# Altium PCB Flexy.PcbDoc
Units mm, origin at the board's own origin, x right, y up, seen from the top; angles counter-clockwise.
Board outline 89.43 x 64.03 mm, 2 copper layers (Top Layer, Bottom Layer); 87 components, 26 nets, 87 pads, 94 vias.
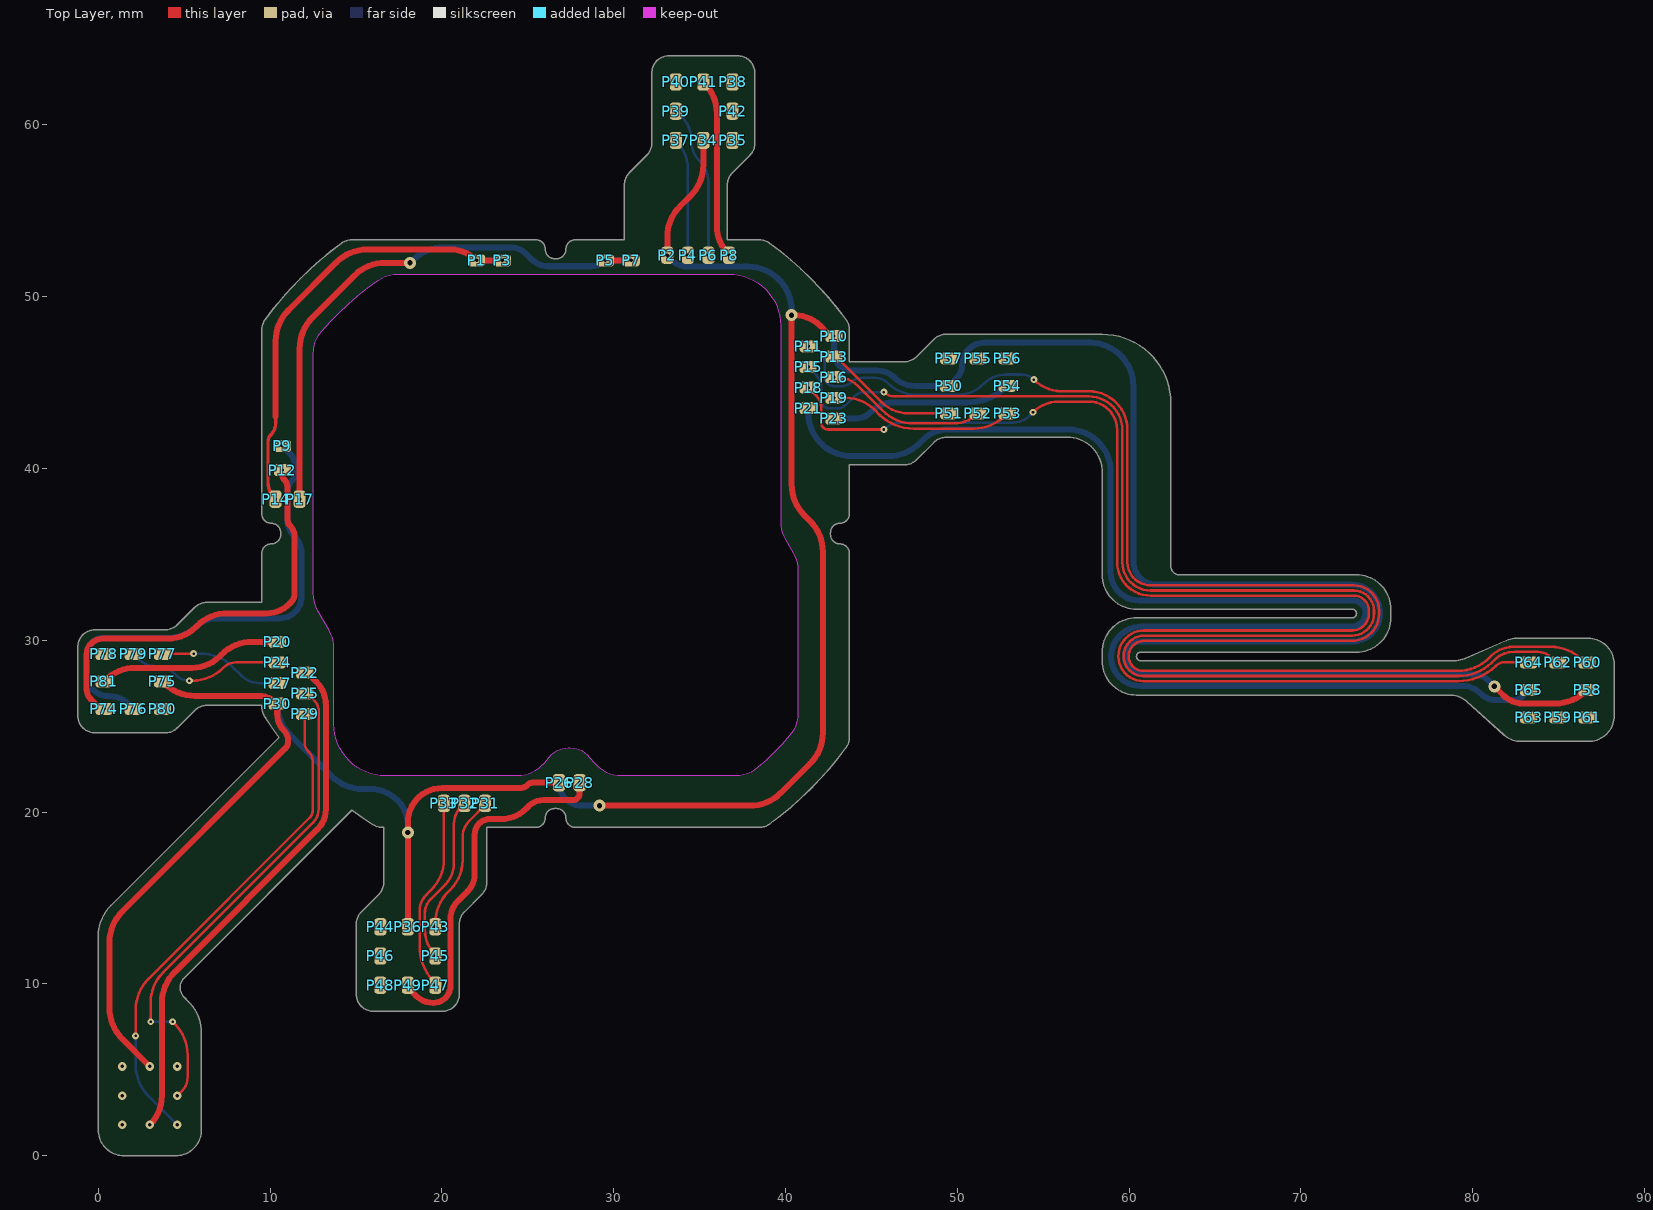
[diagram p0: Top Layer view]
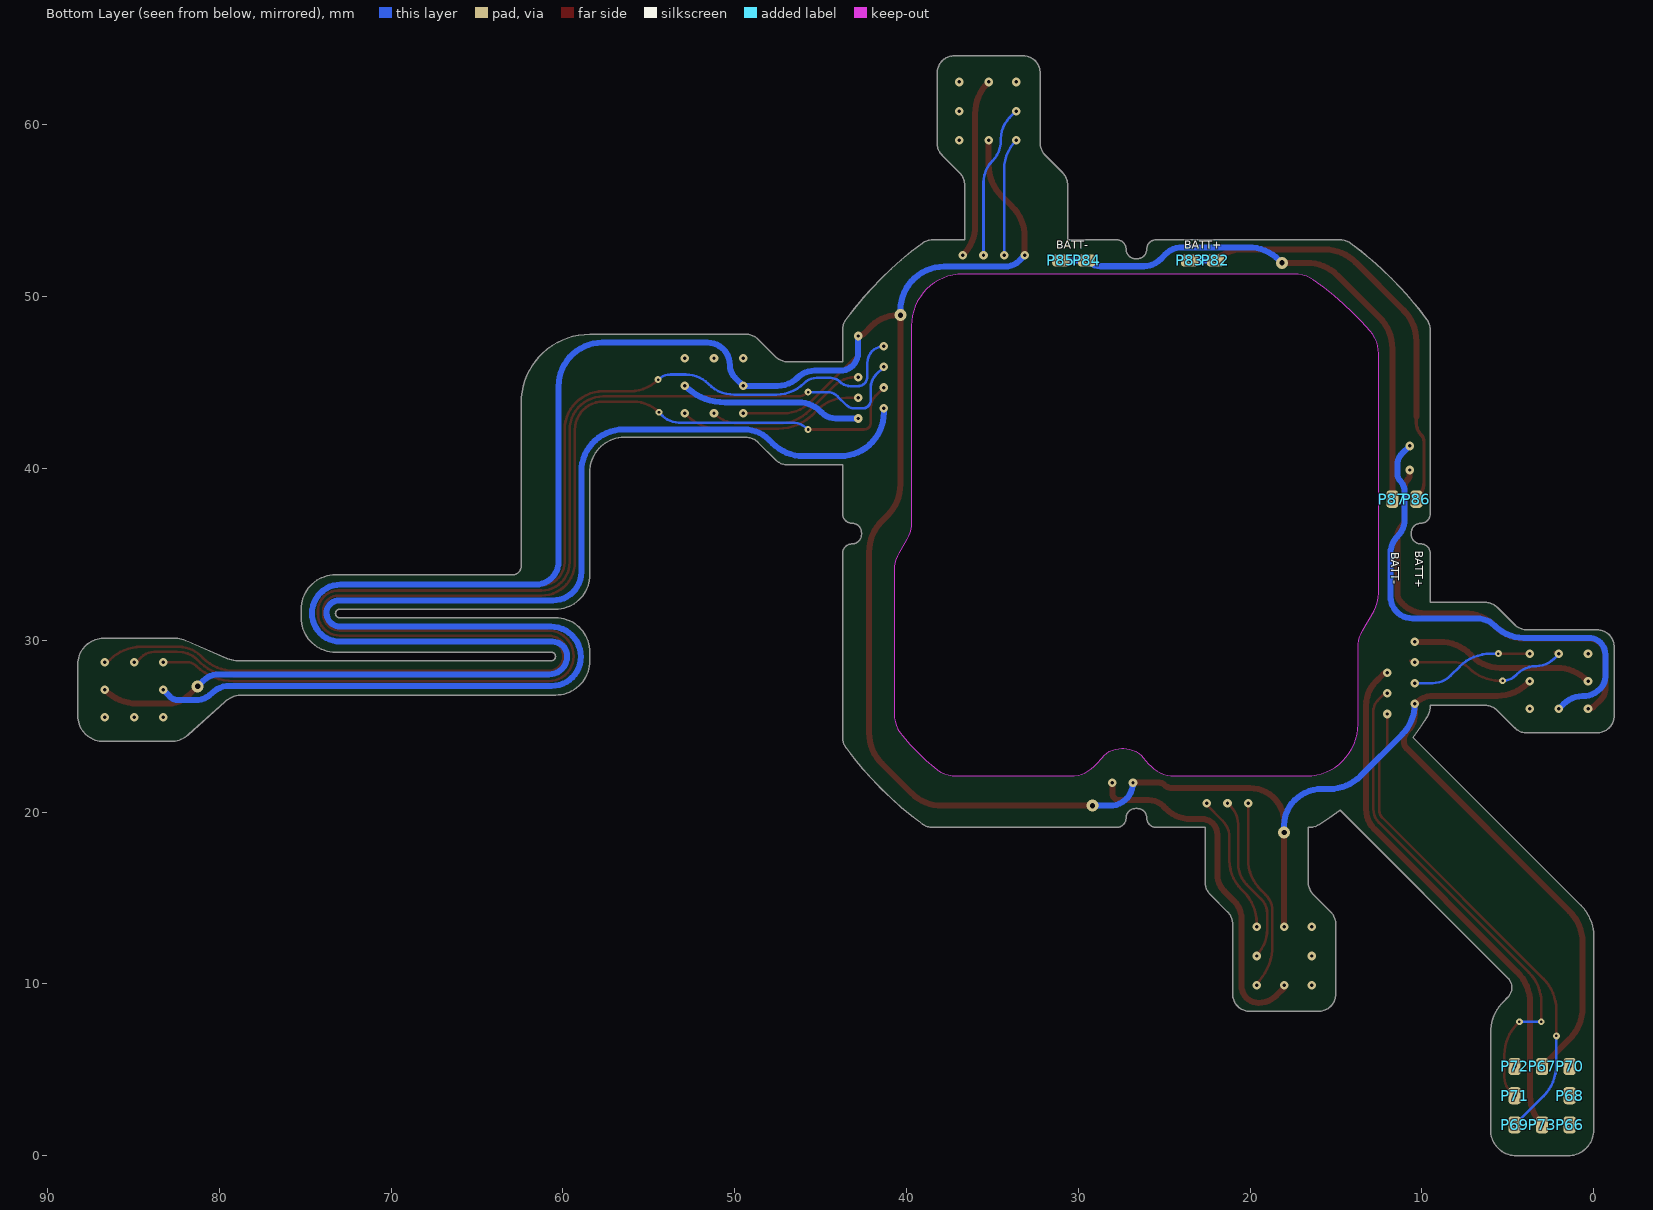
[diagram p1: Bottom Layer view, seen from below]

## Layer stack, top to bottom
Top Coverlay 1: solder mask 0.012, FC-001, Dk 4
Top Layer: signal copper 0.0356
Dielectric 1: dielectric 0.32, FR-4, Dk 4.8
Bottom Layer: signal copper 0.0356
Bottom Coverlay 1: solder mask 0.012, FC-001, Dk 4

## Board outline
0,1.5 ccw(c1.5,1.5) 1.5,0 4.5,0 ccw(c4.5,1.5) 6,1.5 6,7.184 ccw(c3.5,7.184) 5.268,8.952 4.997,9.223 cw(c5.563,9.788) 4.997,10.354 14.754,20.111 ccw(c26.615,36.215) 15.995,19.268 ccw(c16.526,20.115) 16.526,19.115 16.615,19.115 16.615,15.919 cw(c15.615,15.919) 16.322,15.212 15.308,14.198 ccw(c16.015,13.491) 15.015,13.491 15.015,9.405 ccw(c16.015,9.405) 16.015,8.405 20.015,8.405 ccw(c20.015,9.405) 21.015,9.405 21.015,13.491 cw(c22.015,13.491) 21.308,14.198 22.322,15.212 ccw(c21.615,15.919) 22.615,15.919 22.615,19.115 25.465,19.115 ccw(c25.465,19.665) 26.015,19.665 cw(c26.565,19.665) 26.565,20.215 26.665,20.215 cw(c26.665,19.665) 27.215,19.665 ccw(c27.765,19.665) 27.765,19.115 38.481,19.115 ccw(c38.481,20.115) 39.074,19.31 ccw(c26.615,36.215) 43.52,23.756 ccw(c42.715,24.349) 43.715,24.349 43.715,35.065 ccw(c43.165,35.065) 43.165,35.615 cw(c43.165,36.165) 42.615,36.165 42.615,36.265 cw(c43.165,36.265) 43.165,36.815 ccw(c43.165,37.365) 43.715,37.365 43.715,40.215 46.911,40.215 ccw(c46.911,41.215) 47.618,40.508 48.632,41.522 cw(c49.339,40.815) 49.339,41.815 56.425,41.815 cw(c56.425,39.815) 58.425,39.815 58.425,33.815 ccw(c60.425,33.815) 60.425,31.815 72.981,31.815 cw(c72.981,31.565) 72.981,31.315 60.425,31.315 ccw(c60.425,29.315) 58.425,29.315 58.425,28.815 ccw(c60.425,28.815) 60.425,26.815 78.656,26.815 cw(c78.656,25.315) 79.659,26.43 81.804,24.5 ccw(c82.807,25.615) 82.807,24.115 86.731,24.115 ccw(c86.731,25.615) 88.231,25.615 88.231,28.615 ccw(c86.731,28.615) 86.731,30.115 82.542,30.115 ccw(c82.542,28.615) 81.946,29.991 79.517,28.939 cw(c78.92,30.315) 78.92,28.815 60.675,28.815 cw(c60.675,29.065) 60.675,29.315 73.231,29.315 ccw(c73.231,31.315) 75.231,31.315 75.231,31.815 ccw(c73.231,31.815) 73.231,33.815 62.925,33.815 cw(c62.925,34.315) 62.425,34.315 62.425,43.815 ccw(c58.425,43.815) 58.425,47.815 49.339,47.815 ccw(c49.339,46.815) 48.632,47.522 47.618,46.508 cw(c46.911,47.215) 46.911,46.215 43.715,46.215 43.715,48.08 ccw(c42.715,48.08) 43.52,48.674 ccw(c26.615,36.215) 39.074,53.12 ccw(c38.481,52.315) 38.481,53.315 36.615,53.315 36.615,56.511 cw(c37.615,56.511) 36.908,57.218 37.922,58.232 ccw(c37.215,58.939) 38.215,58.939 38.215,63.025 ccw(c37.215,63.025) 37.215,64.025 33.215,64.025 ccw(c33.215,63.025) 32.215,63.025 32.215,58.939 cw(c31.215,58.939) 31.922,58.232 30.908,57.218 ccw(c31.615,56.511) 30.615,56.511 30.615,53.315 27.765,53.315 ccw(c27.765,52.765) 27.215,52.765 cw(c26.665,52.765) 26.665,52.215 26.565,52.215 cw(c26.565,52.765) 26.015,52.765 ccw(c25.465,52.765) 25.465,53.315 14.75,53.315 ccw(c14.75,52.315) 14.156,53.12 ccw(c26.615,36.215) 9.71,48.674 ccw(c10.515,48.08) 9.515,48.08 9.515,37.365 ccw(c10.065,37.365) 10.065,36.815 cw(c10.065,36.265) 10.615,36.265 10.615,36.165 cw(c10.065,36.165) 10.065,35.615 ccw(c10.065,35.065) 9.515,35.065 9.515,32.215 6.319,32.215 ccw(c6.319,31.215) 5.612,31.922 4.598,30.908 cw(c3.891,31.615) 3.891,30.615 -0.195,30.615 ccw(c-0.195,29.615) -1.195,29.615 -1.195,25.615 ccw(c-0.195,25.615) -0.195,24.615 3.891,24.615 ccw(c3.891,25.615) 4.598,24.908 5.612,25.922 cw(c6.319,25.215) 6.319,26.215 9.515,26.215 9.515,26.126 ccw(c10.515,26.126) 9.668,25.595 ccw(c26.615,36.215) 10.512,24.354 0.732,14.575 ccw(c2.5,12.807) 0,12.807
cut-out: 16.715,22.115 cw(c16.715,25.115) 13.715,25.115 13.715,29.579 ccw(c11.715,29.579) 13.447,30.579 12.783,31.729 cw(c14.515,32.729) 12.515,32.729 12.515,46.683 cw(c14.515,46.683) 13.003,47.992 cw(c26.615,36.215) 16.28,50.952 cw(c17.429,49.315) 17.429,51.315 36.715,51.315 cw(c36.715,48.315) 39.715,48.315 39.715,36.883 ccw(c41.715,36.883) 39.983,35.883 40.447,35.079 cw(c38.715,34.079) 40.715,34.079 40.715,25.746 cw(c38.715,25.746) 40.228,24.438 cw(c26.615,36.215) 38.392,22.602 cw(c37.084,24.115) 37.084,22.115 30.444,22.115 cw(c30.444,24.115) 28.916,22.825 28.614,23.182 ccw(c27.468,22.215) 27.468,23.715 27.362,23.715 ccw(c27.362,22.215) 26.216,23.182 25.914,22.825 cw(c24.386,24.115) 24.386,22.115

## Design rules (kind name [scope] priority, off if disabled: settings)
BoardOutlineClearance [All] p1: gap=0.25 ignorepadtopadclearanceinfootprint=FALSE
Clearance [All] p1: gap=0.15 ignorepadtopadclearanceinfootprint=FALSE
ComponentClearance [All] p1: gap=0.1 collisioncheckmode=3 verticalgap=0.1 showdistances=FALSE
DiffPairsRouting [All] p1: maxlimit=0.5 minlimit=0.15 mostfreqgap=0.2 toplayer_minwidth=0.15 toplayer_maxwidth=1 toplayer_prefwidth=0.2 bottomlayer_minwidth=0.15 bottomlayer_maxwidth=1 bottomlayer_prefwidth=0.2 maxuncoupledlength=12.7
HoleSize [All] p1: absolutevalues=TRUE maxlimit=6 minlimit=0.025 maxpercent=80.000 minpercent=20.000
MinimumSolderMaskSliver [All] p1: minsoldermaskwidth=0
PlaneClearance [All] p1: clearance=0.5
PlaneConnect [All] p1: planeconnectstyle=Relief reliefexpansion=0.5 reliefentries=4 reliefconductorwidth=0.25 reliefairgap=0.25
PolygonConnect [All] p1: connectstyle=Relief reliefconductorwidth=0.25 reliefentries=4 polygonreliefangle="90 Angle" airgapwidth=0.25
RoutingVias [All] p1: holewidth=0.3 width=0.6 viastyle="Through Hole" minholewidth=0.15 minwidth=0.35 maxholewidth=0.6 maxwidth=7
SilkToSilkClearance [All] p1: silktosilkclearance=0
SilkToSolderMaskClearance [IsPad] p1: minsilkscreentomaskgap=0 clearancetoexposedcopper=TRUE
SolderMaskExpansion [All] p1: expansion=0.102 istentingtop=FALSE
Width [All] p1: maxlimit=20 minlimit=0.15 preferedwidth=0.2
22 further rules are at their usual default settings.

## Components (designator, comment, footprint, x,y, rotation, side; value= is the part's Value field where it differs from the comment)
P1 "PAD_4" PAD_0.5X1MM 22.015,52.115 r180 top
P2 "PAD_4" PAD_0.5X1MM 33.115,52.415 r90 top
P3 "PAD_4" PAD_0.5X1MM 23.515,52.115 r180 top
P4 "PAD_4" PAD_0.5X1MM 34.315,52.415 r90 top
P5 "PAD_4" PAD_0.5X1MM 29.515,52.115 r180 top
P6 "PAD_4" PAD_0.5X1MM 35.515,52.415 r90 top
P7 "PAD_4" PAD_0.5X1MM 31.015,52.115 r0 top
P8 "PAD_4" PAD_0.5X1MM 36.715,52.415 r90 top
P9 "PAD_4" PAD_0.5X1MM 10.715,41.315 r0 top
P10 "PAD_4" PAD_0.5X1MM 42.815,47.715 r180 top
P11 "PAD_4" PAD_0.5X1MM 41.315,47.115 r0 top
P12 "PAD_4" PAD_0.5X1MM 10.715,39.915 r180 top
P13 "PAD_4" PAD_0.5X1MM 42.815,46.515 r180 top
P14 "PAD_4" PAD_0.5X1MM 10.315,38.215 r90 top
P15 "PAD_4" PAD_0.5X1MM 41.315,45.915 r180 top
P16 "PAD_4" PAD_0.5X1MM 42.815,45.315 r180 top
P17 "PAD_4" PAD_0.5X1MM 11.715,38.215 r90 top
P18 "PAD_4" PAD_0.5X1MM 41.315,44.715 r180 top
P19 "PAD_4" PAD_0.5X1MM 42.815,44.115 r180 top
P20 "PAD_4" PAD_0.5X1MM 10.415,29.915 r180 top
P21 "PAD_4" PAD_0.5X1MM 41.315,43.515 r180 top
P22 "PAD_4" PAD_0.5X1MM 12.015,28.115 r180 top
P23 "PAD_4" PAD_0.5X1MM 42.815,42.915 r0 top
P24 "PAD_4" PAD_0.5X1MM 10.415,28.715 r180 top
P25 "PAD_4" PAD_0.5X1MM 12.015,26.915 r180 top
P26 "PAD_4" PAD_0.5X1MM 26.815,21.715 r90 top
P27 "PAD_4" PAD_0.5X1MM 10.415,27.515 r180 top
P28 "PAD_4" PAD_0.5X1MM 28.015,21.715 r90 top
P29 "PAD_4" PAD_0.5X1MM 12.015,25.715 r180 top
P30 "PAD_4" PAD_0.5X1MM 10.415,26.315 r180 top
P31 "PAD_4" PAD_0.5X1MM 22.515,20.515 r90 top
P32 "PAD_4" PAD_0.5X1MM 21.315,20.515 r90 top
P33 "PAD_4" PAD_0.5X1MM 20.115,20.515 r90 top
P34 "PAD_4" PAD_0.5X1MM 35.215,59.101 r90 top
P35 "PAD_4" PAD_0.5X1MM 36.915,59.101 r90 top
P36 "PAD_4" PAD_0.5X1MM 18.015,13.329 r90 top
P37 "PAD_4" PAD_0.5X1MM 33.615,59.101 r90 top
P38 "PAD_4" PAD_0.5X1MM 36.915,62.501 r90 top
P39 "PAD_4" PAD_0.5X1MM 33.615,60.801 r90 top
P40 "PAD_4" PAD_0.5X1MM 33.615,62.501 r90 top
P41 "PAD_4" PAD_0.5X1MM 35.215,62.501 r90 top
P42 "PAD_4" PAD_0.5X1MM 36.915,60.801 r90 top
P43 "PAD_4" PAD_0.5X1MM 19.615,13.329 r90 top
P44 "PAD_4" PAD_0.5X1MM 16.415,13.329 r90 top
P45 "PAD_4" PAD_0.5X1MM 19.615,11.629 r90 top
P46 "PAD_4" PAD_0.5X1MM 16.415,11.629 r90 top
P47 "PAD_4" PAD_0.5X1MM 19.615,9.929 r90 top
P48 "PAD_4" PAD_0.5X1MM 16.415,9.929 r90 top
P49 "PAD_4" PAD_0.5X1MM 18.015,9.929 r90 top
P50 "PAD_4" PAD_0.5X1MM 49.501,44.815 r180 top
P51 "PAD_4" PAD_0.5X1MM 49.501,43.215 r180 top
P52 "PAD_4" PAD_0.5X1MM 51.201,43.215 r180 top
P53 "PAD_4" PAD_0.5X1MM 52.901,43.215 r180 top
P54 "PAD_4" PAD_0.5X1MM 52.901,44.815 r180 top
P55 "PAD_4" PAD_0.5X1MM 51.201,46.415 r180 top
P56 "PAD_4" PAD_0.5X1MM 52.901,46.415 r180 top
P57 "PAD_4" PAD_0.5X1MM 49.501,46.415 r180 top
P58 "PAD_4" PAD_0.5X1MM 86.656,27.115 r180 top
P59 "PAD_4" PAD_0.5X1MM 84.956,25.515 r180 top
P60 "PAD_4" PAD_0.5X1MM 86.656,28.715 r180 top
P61 "PAD_4" PAD_0.5X1MM 86.656,25.515 r180 top
P62 "PAD_4" PAD_0.5X1MM 84.956,28.715 r180 top
P63 "PAD_4" PAD_0.5X1MM 83.256,25.515 r180 top
P64 "PAD_4" PAD_0.5X1MM 83.256,28.715 r180 top
P65 "PAD_4" PAD_0.5X1MM 83.256,27.115 r180 top
P66 "PAD_4" PAD_0.5X1MM 1.4,1.8 r90 bottom
P67 "PAD_4" PAD_0.5X1MM 3,5.2 r90 bottom
P68 "PAD_4" PAD_0.5X1MM 1.4,3.5 r90 bottom
P69 "PAD_4" PAD_0.5X1MM 4.6,1.8 r90 bottom
P70 "PAD_4" PAD_0.5X1MM 1.4,5.2 r90 bottom
P71 "PAD_4" PAD_0.5X1MM 4.6,3.5 r90 bottom
P72 "PAD_4" PAD_0.5X1MM 4.6,5.2 r90 bottom
P73 "PAD_4" PAD_0.5X1MM 3,1.8 r90 bottom
P74 "PAD_4" PAD_0.5X1MM 0.329,26.015 r180 top
P75 "PAD_4" PAD_0.5X1MM 3.729,27.615 r180 top
P76 "PAD_4" PAD_0.5X1MM 2.029,26.015 r180 top
P77 "PAD_4" PAD_0.5X1MM 3.729,29.215 r180 top
P78 "PAD_4" PAD_0.5X1MM 0.329,29.215 r180 top
P79 "PAD_4" PAD_0.5X1MM 2.029,29.215 r180 top
P80 "PAD_4" PAD_0.5X1MM 3.729,26.015 r180 top
P81 "PAD_4" PAD_0.5X1MM 0.329,27.615 r180 top
P82 "PAD_4" PAD_0.5X1MM 22.015,52.115 r0 bottom
P83 "PAD_4" PAD_0.5X1MM 23.515,52.115 r0 bottom
P84 "PAD_4" PAD_0.5X1MM 29.515,52.115 r0 bottom
P85 "PAD_4" PAD_0.5X1MM 31.015,52.115 r0 bottom
P86 "PAD_4" PAD_0.5X1MM 10.315,38.215 r90 bottom
P87 "PAD_4" PAD_0.5X1MM 11.715,38.215 r90 bottom

## Footprints (in the part's own frame and the unit in brackets; to place one, negate y for a bottom-side part, rotate by r counter-clockwise, add the part's x,y. Pads: shape width x height; smd on the part's side, far side on the other; paste and mask are expansions set on the pad)
PAD_0.5X1MM [mm]
  rrect50% 1x0.7 smd: 1(0,0)

## Part data
P1 P2 P3 P4 P5 P6 P7 P8 P9 P10 P11 P12 P13 P14 P15 P16 P17 P18 P19 P20 P21 P22 P23 P24 P25 P26 P27 P28 P29 P30 P31 P32 P33 P34 P35 P36 P37 P38 P39 P40 P41 P42 P43 P44 P45 P46 P47 P48 P49 P50 P51 P52 P53 P54 P55 P56 P57 P58 P59 P60 P61 P62 P63 P64 P65 P66 P67 P68 P69 P70 P71 P72 P73 P74 P75 P76 P77 P78 P79 P80 P81 P82 P83 P84 P85 P86 P87: "a Rec pad, 0.5X1mm"

## Via types
v1: diameter 0.5, hole 0.2, Top Layer to Bottom Layer, tented both sides, 80 vias
v2: diameter 0.4, hole 0.15, Top Layer to Bottom Layer, tented both sides, 9 vias
v3: diameter 0.7, hole 0.3, Top Layer to Bottom Layer, tented both sides, 5 vias

## Nets (pads, with @x,y where several pads share a name; then routed paths per layer and width w, separated by ;. In a path a pad name is that pad's centre, name@x,y a point inside that pad or via, vN(x,y) a via of type N, cw(c..) or ccw(c..) an arc to the next point about the centre after c; other vN are vias at no path point)
3V3: P2.1 P10.1 P26.1 P30.1 P34.1 P36.1 P50.1 P58.1 P67.1 P75.1 | length 216.6
  Top Layer w0.35: v1(3,5.2) 1.394,6.806 cw(c3.19,8.602) 0.65,8.602 0.65,12.423 cw(c3.19,12.423) 1.394,14.219 10.891,23.716 ; v1(3.729,27.615) 3.84,27.504 ccw(c5.6,29.264) 5.6,26.775 9.304,26.775 cw(c9.304,25.204) v1(10.415,26.315) 10.415,25.715 ccw(c11.815,25.715) 10.825,24.725 cw(c10.282,24.182) 11.05,24.182 11.05,24.1 cw(c10.507,24.1) 10.891,23.716 ; v1(18.015,13.329) v3(18.015,18.822) 18.015,19.415 cw(c20,19.415) 20,21.4 24.517,21.4 ccw(c24.517,22.083) 25,21.6 cw(c25.277,21.323) 25.277,21.715 v1(26.815,21.715) ; v3(29.175,20.375) 37.923,20.375 ccw(c37.923,22.915) 39.719,21.119 41.431,22.831 ccw(c39.635,24.627) 42.175,24.627 42.175,35.148 ccw(c39.635,35.148) 41.431,36.944 41.094,37.281 cw(c42.89,39.077) 40.35,39.077 v3(40.35,48.925) 40.516,48.925 cw(c40.516,46.791) 42.025,48.3 42.465,47.86 ccw(c42.815,48.21) v1(42.815,47.715) ; v1(33.115,52.415) 33.115,53.463 cw(c35.655,53.463) 33.859,55.259 34.471,55.871 ccw(c32.675,57.667) 35.215,57.667 v1(35.215,59.101) ; v3(81.25,27.325) 81.755,26.82 ccw(c82.95,28.015) 82.95,26.325 84.798,26.325 ccw(c84.798,28.865) 86.594,27.069 P58.1@86.65,27.125
  Bottom Layer w0.35: v1(10.415,26.315) 10.415,26.312 ccw(c12.955,26.312) 11.159,24.516 13.581,22.094 ccw(c15.377,23.89) 15.377,21.35 15.825,21.35 cw(c15.825,19.117) 17.404,20.696 17.425,20.675 cw(c16.001,19.251) 18.015,19.251 v3(18.015,18.822) ; v1(26.815,21.715) ccw(c28.155,21.715) 28.155,20.375 v3(29.175,20.375) ; v1(33.115,52.415) 33.43,52.1 ccw(c34.275,52.945) 34.275,51.75 37.81,51.75 cw(c37.81,49.21) 40.35,49.21 v3(40.35,48.925) ; v1(42.815,47.715) 42.815,46.735 ccw(c43.85,46.735) 43.85,45.7 45.359,45.7 cw(c45.359,44.334) 46.325,45.3 ccw(c47.496,46.471) 47.496,44.815 v1(49.501,44.815) 49.984,45.298 ccw(c49.283,46) 50.275,46 50.275,46.025 cw(c51.575,46.025) 51.575,47.325 57.71,47.325 cw(c57.71,44.785) 60.25,44.785 60.25,34.575 ccw(c61.575,34.575) 61.575,33.25 72.925,33.25 cw(c72.925,31.575) 74.6,31.575 cw(c72.95,31.575) 72.95,29.925 60.6,29.925 ccw(c60.6,29.075) 59.75,29.075 ccw(c60.8,29.075) 60.8,28.025 80.025,28.025 cw(c80.025,26.758) 80.921,27.654 v3(81.25,27.325)
  other v1: 86.656,27.115
A1_GND: P28.1 P49.1 | length 20.5
  Top Layer w0.35: v1(18.015,9.929) 18.015,9.779 18.466,9.329 ccw(c19.5,10.363) 19.5,8.9 ccw(c19.5,9.9) 20.5,9.9 20.5,13.8 cw(c21.949,13.8) 20.924,14.824 21.5,15.4 ccw(c20.534,16.366) 21.9,16.366 21.9,18.7 cw(c22.8,18.7) 22.8,19.6 23.451,19.6 ccw(c23.451,21.649) 24.9,20.2 25.046,20.346 cw(c25.9,19.493) 25.9,20.7 27.6,20.7 ccw(c27.6,21.115) 28.015,21.115 v1(28.015,21.715)
A2_GND: P8.1 P41.1 | length 10.5
  Top Layer w0.35: v1(35.215,62.501) 35.256,62.46 cw(c33.46,60.664) 36,60.664 36,54.143 36,54.141 ccw(c38.441,54.141) v1(36.715,52.415)
B1_GND: P23.1 P54.1 | length 10.6
  Bottom Layer w0.35: v1(42.815,42.915) 44.116,42.915 ccw(c44.116,44.059) 44.925,43.25 44.995,43.32 cw(c46.275,42.039) 46.275,43.85 50.571,43.85 ccw(c50.571,47.144) v1(52.901,44.815)
B2_GND: P20.1 P81.1 | length 10.7
  Top Layer w0.35: v1(0.329,27.615) 0.37,27.656 cw(c2.166,25.86) 2.166,28.4 5.445,28.4 ccw(c5.445,30.705) 7.075,29.075 7.171,29.171 cw(c8.967,27.375) 8.967,29.915 v1(10.415,29.915)
BATT+: P1.1 P3.1 P14.1 P82.1 P83.1 P86.1 | length 26.9
  Top Layer w0.2: v1(10.315,38.215) 10.278,38.252 cw(c11.251,39.225) 9.875,39.225 9.875,41.553 cw(c10.472,41.553) 10.05,41.975 ccw(c9.386,42.639) 10.325,42.639 10.325,43.025
  Top Layer w0.35: 10.325,43.025 10.325,47.423 cw(c12.865,47.423) 11.069,49.219 13.856,52.006 cw(c15.652,50.21) 15.652,52.75 20.482,52.75 cw(c20.482,50.582) v1(22.015,52.115) v1(23.515,52.115)
  Bottom Layer w0.35: v1(22.015,52.115) v1(23.515,52.115)
BATT-: P5.1 P7.1 P17.1 P84.1 P85.1 P87.1 | length 32.7
  Top Layer w0.35: v1(11.715,38.215) 11.715,46.988 cw(c14.255,46.988) 12.459,48.784 14.906,51.231 cw(c16.702,49.435) 16.702,51.975 v3(18.15,51.975) ; v1(29.515,52.115) v1(31.015,52.115)
  Bottom Layer w0.35: v3(18.15,51.975) 18.306,52.131 cw(c20.102,50.335) 20.102,52.875 23.924,52.875 cw(c23.924,51.424) 24.95,52.45 25.236,52.164 ccw(c26.175,53.103) 26.175,51.775 28.694,51.775 ccw(c28.694,52.935) v1(29.515,52.115) v1(31.015,52.115)
C1_GND: P21.1 P65.1 | length 85.1
  Bottom Layer w0.35: v1(41.315,43.515) 41.315,43.265 ccw(c43.855,43.265) 43.855,40.725 45.998,40.725 ccw(c45.998,43.265) 47.794,41.469 48,41.675 cw(c49.449,40.226) 49.449,42.275 56.46,42.275 cw(c56.46,39.81) 58.925,39.81 58.925,33.975 ccw(c60.575,33.975) 60.575,32.325 73.025,32.325 cw(c73.025,31.6) 73.75,31.6 cw(c72.95,31.6) 72.95,30.8 60.7,30.8 ccw(c60.7,29.05) 58.95,29.05 ccw(c60.65,29.05) 60.65,27.35 79.399,27.35 cw(c79.399,25.899) 80.425,26.925 ccw(c81.391,27.891) 81.391,26.525 82.4,26.525 ccw(c82.4,27.166) 82.853,26.713 v1(83.256,27.115)
C2_GND: P22.1 P73.1 | length 30.8
  Top Layer w0.35: v1(3,1.8) ccw(c1.31,3.49) 3.7,3.49 3.7,8.898 cw(c6.24,8.898) 4.444,10.694 12.775,19.025 ; v1(12.015,28.115) cw(c12.015,27.765) P22.1@12.262,28.013 ; P22.1@12.263,28.012 12.675,27.6 cw(c11.287,26.212) 13.25,26.212 13.25,20.172 cw(c11.628,20.172) 12.776,19.026
GND: P12.1 P74.1 | length 24.6
  Top Layer w0.35: v1(0.329,26.015) cw(c0.329,26.483) -0.002,26.152 -0.463,26.613 cw(c0.049,27.125) -0.675,27.125 -0.675,29.175 cw(c0.25,29.175) 0.25,30.1 4.025,30.1 ccw(c4.025,32.454) 5.689,30.789 5.731,30.831 cw(c7.527,29.035) 7.527,31.575 9.8,31.575 ccw(c9.8,33.446) 11.123,32.123 11.225,32.225 ccw(c10.742,32.708) 11.425,32.708 11.425,36.046 ccw(c10.571,36.046) 11.175,36.65 cw(c11.537,37.012) 11.025,37.012 11.025,38.867 ccw(c10.342,38.867) 10.825,39.35 cw(c11.091,39.616) 10.715,39.616 v1(10.715,39.915)
SEN_A1_S1: P31.1 P43.1 | length 8.1
  Top Layer w0.15: v1(19.615,13.329) 19.615,13.563 cw(c22.155,13.563) 20.359,15.359 20.5,15.5 ccw(c18.81,17.19) 21.2,17.19 21.2,18.534 cw(c22.566,18.534) 21.6,19.5 22.515,20.415 v1(22.515,20.515)
SEN_A1_S2: P32.1 P45.1 | length 9.8
  Top Layer w0.15: 19,13.191 ccw(c21.155,13.191) 19.631,11.668 v1(19.615,11.629) ; 19,13.193 19,14.1 cw(c20.207,14.1) 19.353,14.953 20.2,15.8 ccw(c18.993,17.007) 20.7,17.007 20.7,19.3 cw(c22.148,19.3) 21.124,20.324 v1(21.315,20.515)
SEN_A1_S3: P33.1 P47.1 | length 11.3
  Top Layer w0.15: 18.7,12.26 ccw(c21.91,12.26) 19.64,9.99 v1(19.615,9.929) ; 18.7,12.261 18.7,14.234 cw(c20.066,14.234) 19.1,15.2 19.371,15.471 ccw(c17.575,17.267) 20.115,17.267 v1(20.115,20.515)
SEN_A2_S1: P4.1 P37.1 | length 6.9
  Bottom Layer w0.15: v1(33.615,59.101) cw(c31.925,57.411) 34.315,57.411 v1(34.315,52.415)
SEN_A2_S2: P6.1 P39.1 | length 8.9
  Bottom Layer w0.15: v1(33.615,60.801) 33.994,60.422 cw(c32.772,59.2) 34.5,59.2 34.5,59.107 ccw(c36.207,59.107) 35,57.9 cw(c33.757,56.657) 35.515,56.657 v1(35.515,52.415)
SEN_B1_S1: P13.1 P51.1 | length 8
  Top Layer w0.15: P13.1 42.935,46.515 45.58,43.87 ccw(c47.162,45.453) 47.162,43.215 v1(49.501,43.215)
SEN_B1_S2: P16.1 P52.1 | length 9.5
  Top Layer w0.15: v1(42.815,45.315) 42.982,45.315 cw(c42.982,43.557) 44.225,44.8 45.656,43.369 ccw(c47.452,45.165) 47.452,42.625 49.777,42.625 ccw(c49.777,44.639) v1(51.201,43.215)
SEN_B1_S3: P19.1 P53.1 | length 10.9
  Top Layer w0.15: v1(42.815,44.115) 43.509,44.115 cw(c43.509,41.759) 45.175,43.425 45.506,43.094 ccw(c45.611,43.201) 45.513,43.087 45.59,43.02 ccw(c47.452,45.165) 47.452,42.325 50.959,42.325 ccw(c50.959,44.865) 52.755,43.069 v1(52.901,43.215)
SEN_B2_S1: P27.1 P77.1 | length 7.2
  Top Layer w0.15: v1(3.729,29.215) 5.526,29.215 ccw(c5.526,29.249) v2(5.55,29.225)
  Bottom Layer w0.15: v2(5.55,29.225) 5.998,29.225 cw(c5.998,26.685) 7.794,28.481 8.325,27.95 ccw(c9.375,29) 9.375,27.515 v1(10.415,27.515)
SEN_B2_S2: P24.1 P79.1 | length 9.8
  Top Layer w0.15: P79.1@2.09,29.19 v1(2.029,29.215) ccw(c2.029,29.543) P79.1@2.261,29.311 ; v2(5.3,27.65) 5.473,27.65 ccw(c5.473,30.19) 7.269,28.394 7.3,28.425 cw(c8,27.725) 8,28.715 v1(10.415,28.715) ccw(c10.415,29.077) P24.1@10.671,28.821
  Bottom Layer w0.15: v1(2.029,29.215) 2.315,28.929 ccw(c3.35,29.963) 3.35,28.5 3.364,28.5 cw(c3.364,26.964) 4.45,28.05 4.532,27.968 ccw(c5.3,28.736) v2(5.3,27.65)
SEN_C1_S1: P11.1 P60.1 | length 90.2
  Top Layer w0.15: v2(54.45,45.175) ccw(c56.08,46.805) 56.08,44.5 57.65,44.5 cw(c57.65,42.25) 59.9,42.25 59.9,34.55 ccw(c61.25,34.55) 61.25,33.2 73.075,33.2 cw(c73.075,31.725) 74.55,31.725 74.55,31.55 cw(c72.975,31.55) 72.975,29.975 60.875,29.975 ccw(c60.875,29.075) 59.975,29.075 ccw(c60.825,29.075) 60.825,28.225 79.148,28.225 ccw(c79.148,30.765) 80.944,28.969 81.07,29.095 cw(c82.35,27.814) 82.35,29.625 84.548,29.625 cw(c84.548,27.085) 86.344,28.881 P60.1@86.45,28.775
  Bottom Layer w0.15: v1(41.315,47.115) cw(c41.315,46.155) 42.275,46.155 42.275,45.35 ccw(c42.825,45.35) 42.825,44.8 ; 42.848,44.796 43.262,44.796 ccw(c43.262,45.663) 43.875,45.05 cw(c44.418,44.507) 44.418,45.275 45.226,45.275 cw(c45.226,44.251) 45.95,44.975 ccw(c47.58,46.605) 47.58,44.3 50.016,44.3 ccw(c50.016,46.434) 51.525,44.925 cw(c52.853,43.597) 52.853,45.475 53.726,45.475 cw(c53.726,44.451) v2(54.45,45.175)
  other v1: 86.656,28.715
SEN_C1_S2: P15.1 P62.1 | length 88
  Top Layer w0.15: v2(45.725,44.45) ccw(c46.329,45.054) 46.329,44.2 57.65,44.2 cw(c57.65,42.25) 59.6,42.25 59.6,34.55 ccw(c61.25,34.55) 61.25,32.9 73.075,32.9 cw(c73.075,31.725) 74.25,31.725 74.25,31.55 cw(c72.975,31.55) 72.975,30.275 60.875,30.275 ccw(c60.875,29.075) 59.675,29.075 ccw(c60.825,29.075) 60.825,27.925 79.148,27.925 ccw(c79.148,30.765) 81.073,28.677 81.125,28.725 81.298,28.899 cw(c82.35,27.814) 81.539,29.089 cw(c82.35,27.814) 81.833,29.234 82.088,29.302 82.094,29.303 cw(c82.12,29.155) 82.113,29.305 82.475,29.325 83.775,29.325 cw(c83.775,28.239) 84.543,29.007 P62.1@84.825,28.725
  Bottom Layer w0.15: v1(41.315,45.915) 41.789,45.441 cw(c41.097,44.75) 42.075,44.75 42.075,43.975 ccw(c42.55,43.975) 42.55,43.5 43.053,43.5 ccw(c43.053,44.097) 43.475,43.675 44.003,44.203 cw(c44.6,43.605) 44.6,44.45 v2(45.725,44.45)
  other v1: 84.956,28.715
SEN_C1_S3: P18.1 P64.1 | length 86.3
  Top Layer w0.15: v1(41.315,44.715) 41.806,44.224 cw(c41.158,43.575) 42.075,43.575 42.075,42.675 ccw(c42.475,42.675) 42.475,42.275 v2(45.725,42.275) ; v2(54.4,43.275) cw(c55.909,41.766) 55.909,43.9 57.65,43.9 cw(c57.65,42.25) 59.3,42.25 59.3,34.55 ccw(c61.25,34.55) 61.25,32.6 73.075,32.6 cw(c73.075,31.725) 73.95,31.725 73.95,31.55 cw(c72.975,31.55) 72.975,30.575 60.875,30.575 ccw(c60.875,29.075) 59.375,29.075 ccw(c60.825,29.075) 60.825,27.625 79.148,27.625 ccw(c79.148,30.765) 81.097,28.303 ccw(c79.148,30.765) 81.276,28.457 81.328,28.504 ccw(c81.125,28.725) 81.337,28.513 cw(c81.849,28.001) 81.849,28.725 P64.1@83.25,28.725
  Bottom Layer w0.15: v2(45.725,42.275) cw(c46.691,41.309) 46.691,42.675 53.25,42.675 ccw(c53.25,44.003) 54.189,43.064 v2(54.4,43.275)
  other v1: 83.256,28.715
SEN_C2_S1: P29.1 P69.1 | length 29.1
  Top Layer w0.15: v2(2.175,6.975) 2.175,8.498 cw(c4.715,8.498) 2.919,10.294 12.3,19.675 ccw(c11.878,20.097) 12.475,20.097 12.475,22.957 ccw(c11.707,22.957) 12.25,23.5 cw(c12.817,24.067) 12.015,24.067 v1(12.015,25.715)
  Bottom Layer w0.15: v2(2.175,6.975) 2.175,5.277 ccw(c4.715,5.277) 2.919,3.481 v1(4.6,1.8)
SEN_C2_S2: P25.1 P71.1 | length 29.4
  Top Layer w0.15: v2(3.05,7.8) 3.05,8.933 cw(c5.505,8.933) 3.769,10.669 12.5,19.4 ccw(c11.715,20.185) 12.825,20.185 12.825,25.896 ccw(c11.971,25.896) 12.575,26.5 12.263,26.812 ccw(c12.015,26.565) v1(12.015,26.915) ; v2(4.325,7.8) 4.456,7.669 cw(c2.66,5.873) 5.2,5.873 5.2,5.739 ; v1(4.6,3.5) 4.864,3.764 ccw(c4.053,4.575) 5.2,4.575 5.2,5.738
  Bottom Layer w0.15: v2(3.05,7.8) v2(4.325,7.8)
VIN: P9.1 P76.1 | length 28.3
  Bottom Layer w0.35: -0.374,27.174 -0.4,27.2 cw(c0.264,27.864) -0.675,27.864 -0.675,29.175 cw(c0.3,29.175) 0.3,30.15 4.087,30.15 ccw(c4.087,32.475) 5.731,30.831 cw(c6.803,29.759) 6.803,31.275 10.55,31.275 ccw(c10.55,32.55) 11.825,32.55 11.825,35.081 ccw(c10.459,35.081) 11.425,36.046 cw(c12.451,37.072) 11,37.072 11,38.636 cw(c11.939,38.636) 11.275,39.3 ccw(c10.913,39.662) 11.425,39.662 11.425,40.2 ccw(c10.447,40.2) 11.139,40.891 v1(10.715,41.315) ; -0.374,27.174 ccw(c0.65,28.199) 0.65,26.75 cw(c0.65,25.195) 1.749,26.295 v1(2.029,26.015)
pads on no net: P35.1 P38.1 P40.1 P42.1 P44.1 P46.1 P48.1 P55.1 P56.1 P57.1 P59.1 P61.1 P63.1 P66.1 P68.1 P70.1 P72.1 P78.1 P80.1
copper on no net:
  other v1: 1.4,1.8 1.4,3.5 1.4,5.2 4.6,5.2 16.415,9.929 16.415,11.629 16.415,13.329 83.256,25.515 84.956,25.515 86.656,25.515 3.729,26.015 0.329,29.215 49.501,46.415 51.201,46.415 52.901,46.415 36.915,59.101 36.915,60.801 33.615,62.501 36.915,62.501

## Silkscreen, mask and mechanical layers (free items; w line width, h text height)
Bottom Overlay:
  text "BATT+" at 23.819,52.619 h0.8
  text "BATT-" at 31.292,52.619 h0.8
  text "BATT+" at 10.571,35.219 h0.8 r90
  text "BATT-" at 11.971,35.142 h0.8 r90
Mechanical 1:
  drawing of 165 lines, arcs and shapes, not listed
Mechanical 13:
  circle w0.2: c10.715,41.315 r0.25
  circle w0.2: c10.315,38.215 r0.25
  circle w0.2: c11.715,38.215 r0.25
  circle w0.2: c10.715,39.915 r0.25
  circle w0.2: c23.515,52.115 r0.25
  circle w0.2: c22.015,52.115 r0.25
  circle w0.05: c33.615,60.801 r0.1
  circle w0.05: c33.615,62.501 r0.1
  circle w0.05: c33.615,59.101 r0.1
  circle w0.05: c36.815,60.801 r0.1
  circle w0.05: c36.815,62.501 r0.1
  circle w0.05: c36.815,59.101 r0.1
  circle w0.05: c35.215,62.501 r0.1
  circle w0.05: c35.215,59.101 r0.1
  circle w0.2: c29.515,52.115 r0.25
  circle w0.2: c31.015,52.115 r0.25
  circle w0.2: c36.715,52.415 r0.25
  circle w0.2: c35.515,52.415 r0.25
  circle w0.2: c34.315,52.415 r0.25
  circle w0.2: c33.115,52.415 r0.25
  circle w0.05: c86.656,28.715 r0.1
  circle w0.05: c86.656,27.115 r0.1
  circle w0.05: c86.656,25.515 r0.1
  circle w0.05: c84.956,28.715 r0.1
  circle w0.05: c84.956,25.515 r0.1
  circle w0.05: c83.256,28.715 r0.1
  circle w0.05: c83.256,27.115 r0.1
  circle w0.05: c83.256,25.515 r0.1
  circle w0.2: c42.815,46.515 r0.25
  circle w0.2: c41.315,44.715 r0.25
  circle w0.2: c42.815,47.715 r0.25
  circle w0.2: c42.815,45.315 r0.25
  circle w0.2: c42.815,44.115 r0.25
  circle w0.2: c42.815,42.915 r0.25
  circle w0.2: c41.315,47.115 r0.25
  circle w0.2: c41.315,45.915 r0.25
  circle w0.2: c41.315,43.515 r0.25
  circle w0.05: c52.901,46.415 r0.1
  circle w0.05: c51.201,46.415 r0.1
  circle w0.05: c49.501,46.415 r0.1
  circle w0.05: c52.901,44.815 r0.1
  circle w0.05: c52.901,43.215 r0.1
  circle w0.05: c51.201,43.215 r0.1
  circle w0.05: c49.501,44.815 r0.1
  circle w0.05: c49.501,43.215 r0.1
  circle w0.2: c28.015,21.715 r0.25
  circle w0.2: c26.815,21.715 r0.25
  circle w0.2: c21.315,20.515 r0.25
  circle w0.2: c22.515,20.515 r0.25
  circle w0.2: c20.115,20.515 r0.25
  circle w0.05: c19.615,9.929 r0.1
  circle w0.05: c18.015,9.929 r0.1
  circle w0.05: c16.415,9.929 r0.1
  circle w0.05: c19.615,13.329 r0.1
  circle w0.05: c19.615,11.629 r0.1
  circle w0.05: c18.015,13.329 r0.1
  circle w0.05: c16.415,13.329 r0.1
  circle w0.05: c16.415,11.629 r0.1
  circle w0.05: c3,1.8 r0.1
  circle w0.05: c3,5.2 r0.1
  circle w0.05: c4.6,1.8 r0.1
  circle w0.05: c1.4,1.8 r0.1
  circle w0.05: c4.6,5.2 r0.1
  circle w0.05: c4.6,3.5 r0.1
  circle w0.05: c1.4,5.2 r0.1
  circle w0.05: c1.4,3.5 r0.1
  circle w0.2: c10.415,28.715 r0.25
  circle w0.2: c10.415,27.515 r0.25
  circle w0.2: c10.415,26.315 r0.25
  circle w0.2: c12.015,25.715 r0.25
  circle w0.2: c12.015,28.115 r0.25
  circle w0.2: c12.015,26.915 r0.25
  circle w0.2: c10.415,29.915 r0.25
  circle w0.05: c3.729,29.215 r0.1
  circle w0.05: c3.729,27.615 r0.1
  circle w0.05: c3.729,26.015 r0.1
  circle w0.05: c2.029,29.215 r0.1
  circle w0.05: c2.029,26.015 r0.1
  circle w0.05: c0.329,29.215 r0.1
  circle w0.05: c0.329,27.615 r0.1
  circle w0.05: c0.329,26.015 r0.1
  lines w0.2: 0.983,14.826 5.226,10.583 ; 5.193,19.035 9.436,14.793 ; 8.71,26.215 8.71,32.215 ; 9.35,23.193 13.593,18.95 ; 10.032,23.875 14.275,19.632 ; 16.615,18.31 22.615,18.31 ; 30.615,54.12 36.615,54.12 ; 44.52,40.215 44.52,46.215 ; 63.424,26.815 63.424,28.815 ; 63.424,29.315 63.424,31.315 ; 63.424,31.815 63.424,33.815 ; 68.828,26.815 68.828,28.815 ; 68.828,29.315 68.828,31.315 ; 68.828,31.815 68.828,33.815 ; 74.232,26.815 74.232,28.815 ; 74.232,29.583 74.232,33.547